# Altium PCB USB_MINER.PcbDoc
Units mm, origin at the board's own origin, x right, y up, seen from the top; angles counter-clockwise.
Board outline 90 x 25 mm, 2 copper layers (Top Layer, Bottom Layer); 92 components, 46 nets, 313 pads, 675 vias.
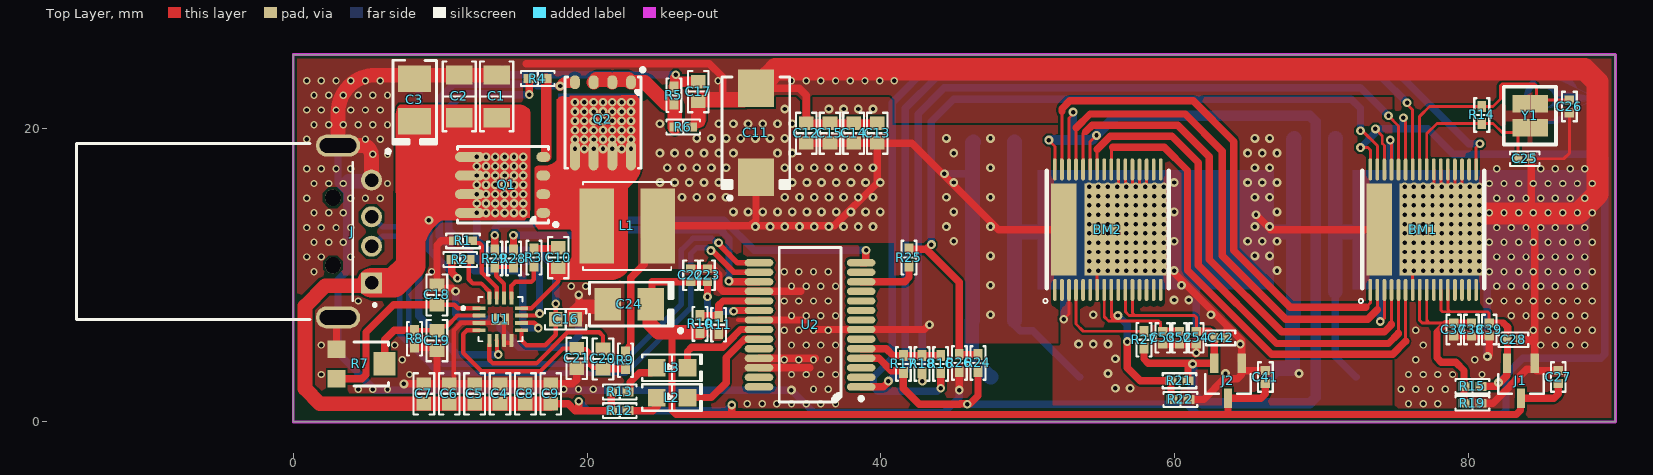
[diagram p0: Top Layer view]
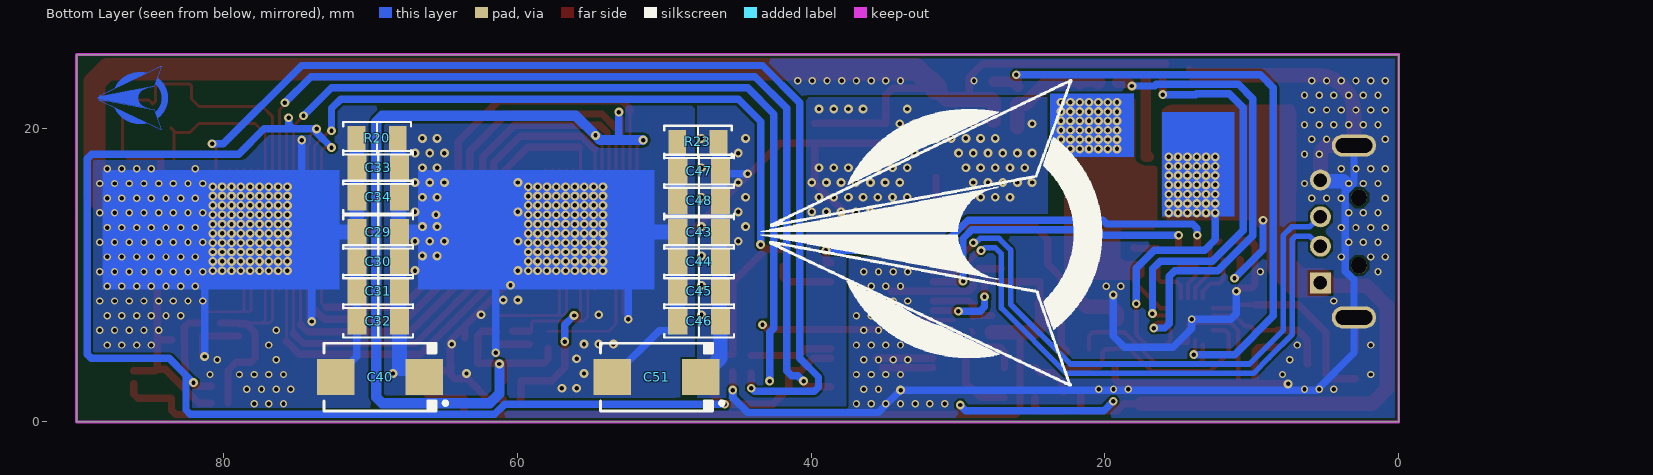
[diagram p1: Bottom Layer view, seen from below]

## Layer stack, top to bottom
Top Solder: solder mask 0.0102, Solder Resist, Dk 3.5
Top Layer: signal copper 0.0356
Dielectric 1: dielectric 0.32, FR-4, Dk 4.8
Bottom Layer: signal copper 0.0356
Bottom Solder: solder mask 0.0102, Solder Resist, Dk 3.5

## Board outline
0,0 0,25 90,25 90,0

## Design rules (kind name [scope] priority, off if disabled: settings)
Clearance [All] p1: gap=0.15 ignorepadtopadclearanceinfootprint=FALSE
DiffPairsRouting [All] p1: maxlimit=0.254 minlimit=0.254 mostfreqgap=0.254 toplayer_minwidth=0.381 toplayer_maxwidth=0.381 toplayer_prefwidth=0.381 bottomlayer_minwidth=0.381 bottomlayer_maxwidth=0.381 bottomlayer_prefwidth=0.381 maxuncoupledlength=12.7
PolygonConnect [All] p1: connectstyle=Direct reliefconductorwidth=0.254 reliefentries=4 polygonreliefangle="90 Angle" airgapwidth=0.254
RoomDefinition USB_TO_TTL [InComponentClass('USB_TO_TTL')] p1: confinementstyle=ConfineOut formatcopy=TRUE lockcomponents=FALSE outline 127.635,108.585 205.486,108.585 205.486,122.555 127.635,122.555
RoomDefinition POWER [InComponentClass('POWER')] p2: confinementstyle=ConfineOut formatcopy=TRUE lockcomponents=FALSE outline 133.858,127.381 361.95,127.381 361.95,149.098 133.858,149.098
RoomDefinition BLOCK2 [InComponentClass('BLOCK2')] p3: confinementstyle=ConfineOut formatcopy=TRUE lockcomponents=FALSE outline 210.439,100.457 338.582,100.457 338.582,120.65 210.439,120.65
RoomDefinition BLOCK1 [InComponentClass('BLOCK1')] p4: confinementstyle=ConfineOut formatcopy=TRUE lockcomponents=FALSE outline 142.367,155.575 304.165,155.575 304.165,175.768 142.367,175.768
RoutingVias [All] p1: holewidth=0.3 width=0.6 viastyle="Through Hole" minholewidth=0.3 minwidth=0.6 maxholewidth=0.3 maxwidth=0.6
SolderMaskExpansion [All] p1: expansion=0.102 istentingtop=FALSE
Width [All] p1: maxlimit=4 minlimit=0.2 preferedwidth=0.5
29 further rules are at their usual default settings.

## Classes and differential pairs
component class USB_TO_TTL: C22 C23 C24 L2 L3 R10 R11 R12 R13 R24 R25 R26 U2
component class POWER: C1 C2 C3 C4 C5 C6 C7 C8 C9 C10 C11 C12 C13 C14 C15 C16 C17 C18 C19 C20 C21 J L1 Q1 Q2 R1 R2 R3 R4 R5 R6 R7 R8 R9 R28 R29 U1
component class BLOCK2: BM2 C41 C42 C43 C44 C45 C46 C47 C48 C51 C52 C53 C54 J2 R21 R22 R23 R27
component class BLOCK1: BM1 C25 C26 C27 C28 C29 C30 C31 C32 C33 C34 C37 C38 C39 C40 J1 R14 R15 R16 R17 R18 R19 R20 Y1
differential pair USB: +USB_P -USB_N

## Components (designator, comment, footprint, x,y, rotation, side; value= is the part's Value field where it differs from the comment)
BM1 "BM1387" BM1387 76.914,13.081 r90 top locked
BM2 "BM1387" BM1387 55.442,13.081 r90 top locked
C1 "1uF" CAP_SMD_1206 13.843,22.151 r90 top
C2 "10uF" CAP_SMD_1206 11.303,22.151 r90 top
C3 "100uF" CAP-TAN-CASE-B 8.255,21.907 r90 top
C4 "100nF" CAP-SMD-0603 14.072,1.905 r90 top
C5 "10uF" CAP-SMD-0603 12.344,1.905 r90 top
C6 "10uF" CAP-SMD-0603 10.617,1.905 r90 top
C7 "10uF" CAP-SMD-0603 8.89,1.905 r90 top
C8 "10uF" CAP-SMD-0603 15.799,1.905 r90 top
C9 "10uF" CAP-SMD-0603 17.526,1.905 r90 top
C10 "100nF" CAP-SMD-0603 18.034,11.176 r270 top
C11 "330uF" CAP-TAN-CASE-E 31.496,19.685 r90 top
C12 "10uF" CAP-SMD-0603 34.925,19.645 r90 top
C13 "10uF" CAP-SMD-0603 39.751,19.645 r90 top
C14 "10uF" CAP-SMD-0603 38.142,19.645 r90 top
C15 "10uF" CAP-SMD-0603 36.534,19.645 r90 top
C16 "100nF" CAP-SMD-0603 18.542,6.985 r0 top
C17 "10nF" CAP-SMD-0603 27.559,22.479 r270 top
C18 "100nF" CAP-SMD-0603 9.779,8.636 r270 top
C19 "10nF" CAP-SMD-0603 9.779,5.528 r90 top
C20 "10nF" CAP-SMD-0603 21.082,4.278 r90 top
C21 "1nF" CAP-SMD-0603 19.304,4.318 r90 top
C22 "100nF" CAP-SMD-0402 27.051,9.974 r270 top
C23 "100nF" CAP-SMD-0402 28.194,9.974 r270 top
C24 "100uF" CAP-TAN-CASE-B 22.86,8.001 r180 top
C25 "100nF" CAP-SMD-0402 83.82,17.907 r180 top
C26 "100nF" CAP-SMD-0402 86.868,21.463 r90 top
C27 "1uF" CAP-SMD-0402 86.106,3.048 r270 top
C28 "1uF" CAP-SMD-0402 83.058,5.588 r180 top
C29 "100nF" CAP_SMD_1206 69.469,12.916 r180 bottom
C30 "1uF" CAP_SMD_1206 69.469,10.896 r180 bottom
C31 "100nF" CAP_SMD_1206 69.469,8.877 r180 bottom
C32 "1uF" CAP_SMD_1206 69.469,6.858 r180 bottom
C33 "100nF" CAP_SMD_1206 69.469,17.31 r180 bottom
C34 "1uF" CAP_SMD_1206 69.469,15.29 r180 bottom
C37 "100nF" CAP-SMD-0402 78.994,6.282 r90 top
C38 "100nF" CAP-SMD-0402 80.2,6.282 r90 top
C39 "100nF" CAP-SMD-0402 81.407,6.282 r90 top
C40 "330uF" CAP-TAN-CASE-E 69.342,3.048 r0 bottom
C41 "1uF" CAP-SMD-0402 66.167,3.048 r270 top
C42 "1uF" CAP-SMD-0402 63.119,5.715 r180 top
C43 "100nF" CAP_SMD_1206 47.625,12.916 r180 bottom
C44 "1uF" CAP_SMD_1206 47.625,10.896 r180 bottom
C45 "100nF" CAP_SMD_1206 47.625,8.877 r180 bottom
C46 "1uF" CAP_SMD_1206 47.625,6.858 r180 bottom
C47 "100nF" CAP_SMD_1206 47.625,17.056 r180 bottom
C48 "1uF" CAP_SMD_1206 47.625,15.036 r180 bottom
C51 "330uF" CAP-TAN-CASE-E 50.523,3.048 r0 bottom
C52 "100nF" CAP-SMD-0402 60.325,5.715 r90 top
C53 "100nF" CAP-SMD-0402 59.182,5.715 r90 top
C54 "100nF" CAP-SMD-0402 61.468,5.715 r90 top
J "USB-AM-S-X-X-TH" SAMTEC_USB-AM-S-X-X-TH 3.048,12.954 r270 top
J1 "MCP1702T-3602E/CB" SOT95P255X145-3N 83.566,2.794 r180 top
J2 "MCP1702T-3602E/CB" SOT95P255X145-3N 63.627,2.794 r180 top
L1 "1.5uH" IND 22.733,13.335 r0 top
L2 "LED" LED-SMD-0805 25.781,1.651 r0 top
L3 "LED" LED-SMD-0805 25.781,3.683 r0 top
Q1 "TPHR9003NL" "ADVANCE SOP" 14.515,16.129 r180 top
Q2 "TPHR9003NL" "ADVANCE SOP" 21.082,20.611 r270 top
R1 "1K" RES-SMD-0402 11.557,12.319 r180 top
R2 "100K" RES-SMD-0402 11.37,11.049 r180 top
R3 "0R" RES-SMD-0402 16.383,11.176 r270 top
R4 "0R" RES-SMD-0402 16.637,23.368 r180 top
R5 "100R" RES-SMD-0402 25.908,22.225 r90 top
R6 "3M" RES-SMD-0402 26.543,20.066 r0 top
R7 "1K" POT 4.572,3.937 r270 top
R8 "1K" RES-SMD-0402 8.255,5.655 r270 top
R9 "100R" RES-SMD-0402 22.606,4.191 r270 top
R10 "4.7K" RES-SMD-0402 27.686,6.664 r270 top
R11 "10K" RES-SMD-0402 28.956,6.604 r90 top
R12 "100R" RES-SMD-0402 22.225,0.762 r180 top
R13 "100R" RES-SMD-0402 22.225,2.032 r180 top
R14 "1M" RES-SMD-0402 80.899,20.888 r270 top
R15 "12.4R" RES-SMD-0402 80.264,2.413 r0 top
R16 "33R" RES-SMD-0402 44.069,3.937 r90 top
R17 "1K" RES-SMD-0402 41.529,3.937 r270 top
R18 "33R" RES-SMD-0402 42.799,3.937 r90 top
R19 "10R" RES-SMD-0402 80.264,1.27 r180 top
R20 "0.5R" RES-SMD-1206 69.544,19.304 r180 bottom
R21 "12.4R" RES-SMD-0402 60.325,2.794 r0 top
R22 "10R" RES-SMD-0402 60.385,1.524 r180 top
R23 "0.5R" RES-SMD-1206 47.7,19.05 r180 bottom
R24 "4.7K" RES-SMD-0402 46.609,4.004 r270 top
R25 "0R" RES-SMD-0402 41.91,11.176 r270 top
R26 "4.7K" RES-SMD-0402 45.339,4.004 r90 top
R27 "4.7K" RES-SMD-0402 57.912,5.588 r270 top
R28 "0R" RES-SMD-0402 14.986,11.116 r90 top
R29 "0R" RES-SMD-0402 13.716,11.116 r90 top
U1 "TPS51219" QFN50P300X300X80-17N 14.097,6.985 r0 top
U2 "FT232RL" SSOP 35.179,6.604 r180 top
Y1 "25MHz" XTALL 84.201,20.828 r90 top

## Footprints (in the part's own frame and the unit in brackets; to place one, negate y for a bottom-side part, rotate by r counter-clockwise, add the part's x,y. Pads: shape width x height; smd on the part's side, far side on the other; paste and mask are expansions set on the pad)
"ADVANCE SOP" [mm]
  oval 2x0.675 smd: D(2.503,1.905) D(2.503,-0.635) D(2.503,0.635) D(2.503,-1.905)
  oval 0.95x0.675 smd: G(-2.503,-1.905) S(-2.503,1.905) S(-2.503,-0.635) S(-2.503,0.635)
  Top Layer region: -1.575,2.25 2.75,2.25 2.75,-2.25 -1.575,-2.25
  silkscreen extent -3.48,-2.6 3.35,2.82, body extent -2.8,-2.55 3.3,2.55, height 1.05
BM1387 [mm]
  oval 1.5x0.25 smd: 1(-4.1,3.6) 2(-4.1,3.12) 3(-4.1,2.64) 4(-4.1,2.16) 5(-4.1,1.68) 6(-4.1,1.2) 7(-4.1,0.72) 8(-4.1,0.24) 9(-4.1,-0.24) 10(-4.1,-0.72) 11(-4.1,-1.2) 12(-4.1,-1.68) 13(-4.1,-2.16) 14(-4.1,-2.64) 15(-4.1,-3.12) 16(-4.1,-3.6) 17(4.1,-3.6) 18(4.1,-3.12) 19(4.1,-2.64) 20(4.1,-2.16) 21(4.1,-1.68) 22(4.1,-1.2) 23(4.1,-0.72) 24(4.1,-0.24) 25(4.1,0.24) 26(4.1,0.72) 27(4.1,1.2) 28(4.1,1.68) 29(4.1,2.16) 30(4.1,2.64) 31(4.1,3.12) 32(4.1,3.6)
  rect 6.25x5.6 smd: 33(0,-1.2)
  rect 6.25x1.75 smd: 34(0,3)
  Top Layer pour cut-out: 4.953,3.683 -4.953,3.683 -4.953,-3.81 4.953,-3.81
  Bottom Layer region: -4.086,-11.303 4.064,-11.303 4.064,4.797 -4.086,4.797
  silkscreen extent -5,-4.15 4,4.39, body extent -8.75,-11.18 8.75,4.72, height 12.65
CAP-SMD-0402 [mm]
  rect 0.6x0.64 smd: 1(-0.44,0) 2(0.44,0)
  silkscreen extent -1,-0.5 1,0.5, body extent -0.5,-0.26 0.5,0.26, height 0.52
CAP-SMD-0603 [mm]
  rect 0.9x1 smd: 1(-0.675,0) 2(0.675,0)
  silkscreen extent -1.4,-0.7 1.4,0.7, body extent -0.8,-0.41 0.8,0.41, height 0.82
CAP-TAN-CASE-B [mm]
  rect 1.8x2.23 smd: 1(-1.46,0) 2(1.46,0)
  silkscreen extent -3.62,-1.5 2.71,1.92, body extent -1.87,-1.45 1.86,1.45, height 2
CAP-TAN-CASE-E [mm]
  rect 2.55x2.45 smd: 1(-3.025,0) 2(3.025,0)
  silkscreen extent -4.57,-2.3 3.8,2.3, body extent -3.81,-2.3 3.79,2.3, height 2
CAP_SMD_1206 [mm]
  rect 1.3x1.8 smd: 1(-1.45,0) 2(1.45,0)
  silkscreen extent -2.37,-1.12 2.37,1.12, body extent -1.6,-0.8 1.6,0.8, height 1.2
IND [mm]
  rect 2.35x5.1 smd: 1(-2.075,0) 2(2.075,0)
  silkscreen extent -3,-3 3,3, body extent -3.15,-3 3.15,3, height 4.5
LED-SMD-0805 [mm]
  rect 1.2x1.2 smd: 1(-1.05,0) 2(1.05,0)
  silkscreen extent -2.03,-0.9 2.03,0.9, body extent -1,-0.62 1,0.63, height 0.9
POT [mm]
  rect 1.2x1.2 smd: 1(-1,-1.625) 3(1,-1.625)
  rect 1.6x1.5 smd: 2(0,1.625)
  silkscreen extent -1.5,-0.42 1.5,1.92, body extent -1.8,-1.74 1.8,2.13, height 1.15
QFN50P300X300X80-17N [mm]
  rrect25% 0.89x0.26 smd: 1(-1.44,0.75) 2(-1.44,0.25) 3(-1.44,-0.25) 4(-1.44,-0.75) 9(1.44,-0.75) 10(1.44,-0.25) 11(1.44,0.25) 12(1.44,0.75)
  rrect25% 0.26x0.89 smd: 5(-0.75,-1.44) 6(-0.25,-1.44) 7(0.25,-1.44) 8(0.75,-1.44) 13(0.75,1.44) 14(0.25,1.44) 15(-0.25,1.44) 16(-0.75,1.44)
  rect 1.2x0.8 smd paste-2: 17(0,0)
  round 0.5 hole 0.3: 17(0,0)
  silkscreen extent -2.63,-1.5 1.5,1.5, body extent -1.5,-1.5 1.5,1.5, height 0.8
RES-SMD-0402 [mm]
  rect 0.75x0.6 smd: 1(-0.575,0) 2(0.575,0)
  silkscreen extent -1.14,-0.51 1.14,0.51, body extent -0.5,-0.25 0.5,0.25, height 0.35
RES-SMD-1206 [mm]
  rect 1.2x1.65 smd: 1(-1.4,0) 2(1.4,0)
  silkscreen extent -2.3,-1.1 2.3,1.1, body extent -1.58,-0.8 1.62,0.8, height 0.6
SAMTEC_USB-AM-S-X-X-TH [mm]
  rect 1.428x1.428 hole 0.92: 01(3.5,2.28)
  round 1.428 hole 0.92: 02(1,2.28) 03(-1,2.28) 04(-3.5,2.28)
  oval 1.508x3.016 hole 1 slot 2.5 at 90 deg: S1(-5.85,0) S2(5.85,0)
  round 1.1 hole 1.1 unplated: ""(-2.3,-0.35) ""(2.3,-0.35)
  silkscreen extent -6,-17.8 6,2.6, body extent -6.35,-17.65 6.35,2.55, height 4.5
SOT95P255X145-3N [mil]
  rect 22x52 smd: 1(-37,-47) 2(37,-47) 3(0,47)
  silkscreen extent -61,-18 61,35, body extent -59,-49 59,49, height 40
SSOP [mm]
  oval 1.95x0.5 smd: 1(-3.475,4.225) 2(-3.475,3.575) 3(-3.475,2.925) 4(-3.475,2.275) 5(-3.475,1.625) 6(-3.475,0.975) 7(-3.475,0.325) 8(-3.475,-0.325) 9(-3.475,-0.975) 10(-3.475,-1.625) 11(-3.475,-2.275) 12(-3.475,-2.925) 13(-3.475,-3.575) 14(-3.475,-4.225) 15(3.475,-4.225) 16(3.475,-3.575) 17(3.475,-2.925) 18(3.475,-2.275) 19(3.475,-1.625) 20(3.475,-0.975) 21(3.475,-0.325) 22(3.475,0.325) 23(3.475,0.975) 24(3.475,1.625) 25(3.475,2.275) 26(3.475,2.925) 27(3.475,3.575) 28(3.475,4.225)
  silkscreen extent -3.6,-5.25 2.1,5.25, body extent -3.91,-5.1 3.91,5.1, height 1.97
XTALL [mm]
  rect 1.2x1.2 smd: 1(0.813,-0.612) 2(-0.813,0.613) 3(-0.813,-0.612) 4(0.813,0.613)
  silkscreen extent -1.96,-1.76 1.98,1.8, body extent -1.6,-1.27 1.6,1.23, height 0.87

## Part data
C1 C2 C4 C5 C6 C7 C8 C9 C10 C12 C13 C14 C15 C16 C17 C18 C19 C20 C21 C22 C23 C25 C26 C27 C28 C29 C30 C31 C32 C33 C34 C37 C38 C39 C41 C42 C43 C44 C45 C46 C47 C48 C52 C53 C54: library part CAP
C3 C11 C24 C40 C51: library part "POLARIZED CAP"
J: "USB-A (USB TYPE-A) USB 2.0 Plug Connector 4 Position Through Hole, Right Angle", Package=None, Availability=Unavailable, MF=Samtec, MP=USB-AM-S-F-B-TH, Price=None, SnapEDA_Link=https://www.snapeda.com/parts/USB-AM-S-F-B-TH/Samtec%20Inc./view-part/474273/?ref=snap, Toby_UK-Purchase-URL=https://snapeda.com/shop?store=Toby+UK&id=474273
J1 J2: "250 mA Low Quiescent Current LDO Regulator", Package=None, Availability=Unavailable, MP=MCP1702T-3602E/CB, Price=None
L1: library part INDUCTOR
Q1 Q2: library part MOSFET-N
R1 R2 R3 R4 R5 R6 R8 R9 R10 R11 R12 R13 R14 R15 R16 R17 R18 R19 R20 R21 R22 R23 R24 R25 R26 R27 R28 R29: library part RES
R7: library part Potentiometer, "Potentiometer"
Y1: library part XTAL, "Crystal Oscillator", LatestRevisionDate=17-Jul-2002, LatestRevisionNote="Re-released for DXP Platform.", PackageDescription="Crystal, Thru-Hole; 2 Leads; Body 3.1 x 8.2 mm (Dia.xH)", PackageReference=R38, Published=8-Jun-2000, Publisher="Altium Limited"

## Via types
v1: diameter 0.6, hole 0.3, Top Layer to Bottom Layer, 451 vias
v2: diameter 0.5, hole 0.3, Top Layer to Bottom Layer, 224 vias

## Nets (pads, with @x,y where several pads share a name; then routed paths per layer and width w, separated by ;. In a path a pad name is that pad's centre, name@x,y a point inside that pad or via, vN(x,y) a via of type N, cw(c..) or ccw(c..) an arc to the next point about the centre after c; other vN are vias at no path point)
0.8V-1: BM1.8 BM1.9 C37.2 C38.2 R15.1 R19.2 | length 15.6
  Top Layer w0.2: BM1.8 76.674,6.892 76.844,6.722 77.343,6.722 ; BM1.9 77.154,6.911 77.343,6.722 ; C37.2 77.343,6.722
  Top Layer w0.5: R19.2 R15.1 79.689,3.496 79.121,4.064 78.144,4.064 77.851,4.357 77.851,6.096 78.427,6.672 78.944,6.672 C37.2 C38.2
0.8V-2: BM2.8 BM2.9 C52.2 C53.2 R21.1 R22.2 | length 18.3
  Top Layer w0.2: BM2.8 55.202,7.155 55.499,6.858 58.928,6.858 59.045,6.741 59.045,6.292 C53.2 ; 55.682,7.112 BM2.9
  Top Layer w0.5: v1@55.88,7.112 55.98,7.112 56.107,7.239 v1(56.134,7.239) ; v1(56.769,5.461) 56.769,3.683 57.658,2.794 R21.1 59.75,1.574 59.8,1.524 R22.2 ; C53.2 C52.2
  Bottom Layer w0.5: v1(56.134,7.239) 56.769,6.604 v1(56.769,5.461)
1.8V-1: BM1.11 BM1.12 BM1.27 BM1.30 BM1.32 C28.2 C39.2 J1.2 R15.2 R17.2 R24.2 U2.4 | length 113.5
  Top Layer w0.2: v1(72.644,18.669) 73.152,18.669 73.314,18.507 BM1.32 ; v1(73.66,19.939) 73.66,19.923 74.126,19.457 74.126,18.949 74.274,18.801 BM1.30 ; v1(75.565,20.701) 75.565,20.593 75.714,20.444 75.714,20.268 BM1.27 ; BM1.11 78.114,7.611 78.232,7.493 78.74,7.493 ; BM1.12 78.594,7.639 78.74,7.493 ; C39.2 81.407,7.366 81.28,7.493 78.74,7.493
  Top Layer w0.5: U2.4 39.867,4.329 40.709,3.487 41.479,3.487 41.529,3.437 41.529,2.286 42.615,1.2 45.37,1.2 ; 45.385,1.219 45.855,1.219 v1(45.874,1.2) ; v1@45.874,1.219 46.06,1.219 46.609,1.768 R24.2 ; R15.2 v1@81.885,2.413 ; C39.2 82.384,6.722 82.677,6.429 82.677,5.424 82.651,5.398 82.651,4.012 J1.2 82.597,3.958 82.597,3.125 v1@82.09,2.619
  Bottom Layer w0.5: v1(45.874,1.2) 60.858,1.2 61.55,0.508 82.257,0.508 82.55,0.801 82.55,3.175 ; v1(72.644,18.669) v1@73.641,19.666 ; v1(73.66,19.939) 75.272,19.939 ; v1(75.565,20.701) 75.546,20.682 75.546,20.213 75.272,19.939 ; v1(82.042,2.667) 82.55,3.175 ; 75.272,19.939 77.236,19.939 78.952,18.223 88.965,18.223 89.281,17.907 89.281,4.611 88.988,4.318 83.693,4.318 82.55,3.175
1.8V-2: BM2.11 BM2.12 BM2.27 BM2.30 BM2.32 C42.2 C54.2 J2.2 R21.2 R27.2 | length 78.5
  Top Layer w0.2: v1(51.435,19.177) 51.435,19.142 51.842,18.735 BM2.32 ; BM2.30 52.802,20.69 53.086,20.974 v1(53.086,21.082) ; BM2.27 54.232,17.191 54.232,18.331 54.222,18.342 54.222,19.039 v1(54.676,19.493) ; BM2.11 56.642,7.493 56.896,7.239 57.277,7.239 ; BM2.12 57.122,7.394 57.277,7.239 ; C54.2 61.468,7.112 61.341,7.239 57.277,7.239
  Top Layer w0.5: R27.2 57.912,4.281 58.205,3.988 J2.2 62.687,5.862 62.394,6.155 C54.2 ; R21.2 60.9,3.921
  Bottom Layer w0.5: 52.898,19.177 53.086,19.365 v1(53.086,21.082)
  Bottom Layer w0.7: v1(51.435,19.177) 52.898,19.177 54.36,19.177 v1(54.676,19.493) 56.011,20.828 69.186,20.828 69.596,20.418 69.596,1.668 69.186,1.258 61.861,1.258 61.214,1.905 v1(61.214,3.937)
3.3V: R28.2 U2.17 | length 21.1
  Top Layer w0.5: R28.2 v1(14.986,12.7) ; v1(29.656,9.579) 29.683,9.579 29.733,9.529 U2.17
  Bottom Layer w0.5: v1(14.986,12.7) 20.193,12.7 20.574,13.081 29.053,13.081 29.656,12.478 v1(29.656,9.579)
5V: C1.1 C2.1 C3.1 C4.1 C5.1 C6.1 C7.1 C8.1 C9.1 C16.1 C22.2 C23.2 C24.1 C27.2 C41.2 J1.3 J2.3 J.01 Q1.D R2.2 R10.2 R12.2 R13.2 U1.9 U2.20 | length 171.1
  Top Layer w0.3: U1.9 15.537,5.545 15.875,5.207 17.144,5.207 17.867,5.93 C16.1 v1(17.867,8.041)
  Top Layer w0.5: R2.2 10.795,10.16 v1(11.176,9.779) ; C9.1 18.709,1.23 19.177,0.762 19.431,0.762 ; v1(19.431,1.397) 19.431,0.762 ; R13.2 R12.2 19.431,0.762 ; C24.1 24.423,8.104 24.423,9.534 C22.2 C23.2 v1(28.194,8.509) ; 25.781,6.096 25.781,0.793 26.074,0.5 29.845,0.5 ; v1(29.845,1.143) 29.845,0.5 ; v1(29.972,7.529) 29.999,7.529 30.049,7.579 U2.20 ; C41.2 66.167,1.893 65.874,1.6 J2.3 63.627,0.5 ; C27.2 86.106,1.893 85.813,1.6 J1.3 83.537,1.571 83.537,0.793 83.244,0.5 63.627,0.5 ; 29.845,0.5 63.627,0.5
  Top Layer w1: J.01 5.145,9.271 2.193,9.271 0.8,7.878 0.8,2.248 1.818,1.23 C7.1 C6.1 C5.1 C4.1 C8.1 C9.1 ; C24.1 24.257,7.938 24.257,6.682 24.843,6.096 25.781,6.096 27.679,6.096 R10.2
  Top Layer w2: J.01 6.829,9.454 8.001,10.626 8.001,15.621 9.779,17.399 v1@14.732,17.399
  Bottom Layer w0.5: v1(9.236,13.716) 9.236,11.719 v1(11.176,9.779) ; v1(12.483,14.224) 12.483,12.409 13.208,11.684 16.637,11.684 17.867,10.454 v1(17.867,8.041) ; v1(19.431,1.397) 20.066,0.762 29.464,0.762 v1(29.845,1.143) ; v1(28.194,8.509) 28.194,7.822 28.487,7.529 v1(29.972,7.529)
  other v1: 13.118,14.224 13.753,14.224 14.388,14.224 15.023,14.224 15.658,14.224 12.483,14.859 13.118,14.859 13.753,14.859 14.388,14.859 15.023,14.859 15.658,14.859 12.483,15.494 13.118,15.494 13.753,15.494 14.388,15.494 15.023,15.494 15.658,15.494 12.483,16.129 13.118,16.129 13.753,16.129 14.388,16.129 15.023,16.129 15.658,16.129 12.483,16.764 13.118,16.764 13.753,16.764 14.388,16.764 15.023,16.764 15.658,16.764 12.483,17.399 13.118,17.399 13.753,17.399 14.388,17.399 15.023,17.399 15.658,17.399 12.483,18.034 13.118,18.034 13.753,18.034 14.388,18.034 15.023,18.034 15.658,18.034
BO1: BM1.2 BM2.29 | length 35.3
  Top Layer w0.2: BM2.29 53.282,19.988 53.302,20.008 ; 73.794,7.627 BM1.2
  Top Layer w0.5: 53.302,20.008 53.302,20.028 54.229,20.955 60.706,20.955 63.246,18.415 63.246,11.303 67.569,6.98 73.147,6.98 73.794,7.627
CLK1: BM1.6 BM2.24 | length 35.2
  Top Layer w0.2: BM2.24 55.682,18.59 55.788,18.696 ; 75.714,5.483 BM1.6
  Top Layer w0.5: 55.788,18.696 59.282,18.696 60.872,17.106 60.872,10.322 66.585,4.609 74.84,4.609 75.714,5.483
CO1: BM1.5 BM2.26 | length 35.4
  Top Layer w0.2: BM2.26 54.722,18.549 ; 75.214,6.019 75.234,6.039 BM1.5
  Top Layer w0.5: 54.722,18.549 55.604,19.431 59.817,19.431 61.595,17.653 61.595,10.668 66.929,5.334 74.549,5.334 75.214,5.999 75.214,6.019
GND: BM1.3 BM1.7 BM1.19 BM1.20 BM1.21 BM1.22 BM1.23 BM1.29 BM1.33 C1.2 C2.2 C3.2 C4.2 C5.2 C6.2 C7.2 C8.2 C9.2 C11.2 C12.2 C13.2 C14.2 C15.2 C16.2 C17.2 C18.1 C19.1 C21.1 C22.1 C23.1 C24.2 C25.1 C26.1 C27.1 C28.1 C29.1 C30.1 C31.1 C32.1 C33.1 C34.1 C37.1 C38.1 C39.1 C40.2 J1.1 J.04 J.S1 J.S2 R1.2 R6.2 R7.1 R8.2 R11.1 R19.1 R20.1 R26.1 U1.3 U1.7 U1.8 U1.17 U2.7 U2.18 U2.21 U2.25 U2.26 | length 352.1
  Top Layer w0.2: v1(73.986,6.829) 74.047,6.829 74.294,7.076 74.294,8.072 74.274,8.092 BM1.3 ; v1(74.676,19.177) 74.744,19.109 74.744,17.191 BM1.29 ; v1(75.644,10.922) 76.194,10.372 BM1.7 ; v1(77.549,16.002) 77.634,16.087 BM1.23 ; BM1.33 78.594,13.561 BM1.21 ; BM1.22 78.114,14.802 v1(78.184,14.732) ; BM1.33@78.657,13.624 BM1.33@78.974,13.942 ; BM1.33@79.074,14.041 BM1.20 ; v1(79.454,15.367) 79.554,15.467 BM1.19 ; C25.1 86.487,17.907 86.868,18.288 C26.1
  Top Layer w0.3: C6.2@10.622,2.58 10.922,2.88 10.922,6.223 11.434,6.735 U1.3 13.793,6.735 14.043,6.985 14.097,6.985 14.097,6.931 14.347,6.681 U1.7 14.347,5.389 14.367,5.369 U1.8@14.827,5.369 ; R11.1 28.956,6.104 R11.1@29.106,6.254 ; 30.287,6.929 U2.21
  Top Layer w0.5: R7.1 2.947,7.003 J.S2 ; v1(7.533,2.58) C7.2 9.754,2.58 ; R8.2 9.236,5.08 9.263,5.053 9.579,5.053 C19.1 9.779,2.605 9.754,2.58 ; R1.2 10.072,12.319 9.779,12.026 C18.1 9.979,9.111 10.801,9.111 11.022,8.89 v1(11.049,8.89) ; C1.2 C1.2@14.243,24.001 ; 15.837,24.384 28.321,24.384 29.231,23.474 29.231,21.935 ; C21.1 19.304,2.873 19.011,2.58 C9.2 C8.2 C4.2 C5.2 10.622,2.58 C6.2 9.754,2.58 ; v1(19.431,8.636) 19.45,8.617 19.45,7.982 19.597,7.835 ; C22.1 C23.1 28.575,10.414 28.956,10.033 28.956,9.172 29.249,8.879 U2.18 34.555,8.879 ; C11.2 34.44,22.71 34.925,22.225 C12.2 C15.2 C14.2 C13.2 ; U2.26 35.175,3.679 ; U2.25 v2@35.549,4.329 ; U2.21 34.854,6.929 ; v2@35.377,6.279 U2.7 42.955,6.279 43.28,6.604 v1(43.307,6.604) ; v1(45.339,2.159) R26.1 ; C37.1 C38.1 C39.1 81.407,4.572 v1(81.28,4.445) ; R19.1 81.661,1.27 83.968,3.577 84.476,3.577 J1.1@84.506,3.607 ; C28.1 84.213,5.588 84.506,5.295 ; C25.1 84.26,14.861 83.566,14.167 84.506,13.227 84.506,5.295 ; C27.1 84.625,3.488 J1.1@84.506,3.607 ; J1.1@84.506,3.607 J1.1 84.506,5.295
  Top Layer w1: J.04 5.328,18.07 ccw(c4.481,18.07) 5.08,18.669 ccw(c4.754,18.343) 4.754,18.804 J.S1 3.048,21.046 cw(c5.588,21.046) 3.792,22.842 3.807,22.857 cw(c5.603,21.061) 5.603,23.601 C2.2 C1.2 ; C16.2 19.217,7.455 19.597,7.835 21.234,7.835 C24.2 ; 27.559,20.507 C17.2 27.69,21.935 29.231,21.935 30.771,21.935 C11.2@31.496,22.66
  Top Layer w1.5: C11.2@31.496,22.66 C11.2 31.496,22.76 31.971,23.235 32.071,23.235 32.836,24 87.894,24 88.773,23.121 88.773,15.494 87.446,14.167 83.566,14.167 80.159,14.167 v1(80.089,14.097)
  Bottom Layer w0.5: J.S1 3.048,16.248 3.648,15.648 3.648,10.26 3.048,9.66 J.S2 3.048,4.699 5.588,2.159 7.366,2.159 7.514,2.307 7.514,2.561 v1(7.533,2.58) ; 7.533,2.159 v1(33.909,2.159) 35.433,0.635 44.323,0.635 45.339,1.651 v1(45.339,2.159) ; v1(11.049,8.89) 11.049,7.366 11.43,6.985 14.097,6.985 14.097,6.35 15.367,5.08 18.669,5.08 19.431,5.842 v1(19.431,8.636) ; C31.1 C32.1 70.919,4.446 72.317,3.048 C40.2 ; v1(73.986,6.829) 73.986,9.343 ; 74.676,16.51 v1(74.676,19.177) ; v1(81.28,4.445) 81.28,9.906
  Bottom Layer w1: v2@3.525,16.124 3.773,16.372 5.246,16.372 J.04 ; C29.1 C29.1@70.931,12.916 ; C31.1@70.931,8.877 C29.1@70.931,12.916 ; R20.1 70.931,19.291 C29.1@70.931,12.916 ; 74.257,12.916 C29.1@70.931,12.916
  other v1: 75.644,10.287 76.279,10.287 76.914,10.287 77.549,10.287 78.184,10.287 78.819,10.287 79.454,10.287 80.089,10.287 80.724,10.287 76.279,10.922 76.914,10.922 77.549,10.922 78.184,10.922 78.819,10.922 79.454,10.922 80.089,10.922 80.724,10.922 75.644,11.557 76.279,11.557 76.914,11.557 77.549,11.557 78.184,11.557 78.819,11.557 79.454,11.557 80.089,11.557 80.724,11.557 75.644,12.192 76.279,12.192 76.914,12.192 77.549,12.192 78.184,12.192 78.819,12.192 79.454,12.192 80.089,12.192 80.724,12.192 75.644,12.827 76.279,12.827 76.914,12.827 77.549,12.827 78.184,12.827 78.819,12.827 79.454,12.827 80.089,12.827 80.724,12.827 75.644,13.462 76.279,13.462 76.914,13.462 77.549,13.462 78.184,13.462 78.819,13.462 79.454,13.462 80.089,13.462 80.724,13.462 75.644,14.097 76.279,14.097 76.914,14.097 77.549,14.097 78.184,14.097 78.819,14.097 79.454,14.097 80.724,14.097 75.644,14.732 76.279,14.732 76.914,14.732 77.549,14.732 78.819,14.732 79.454,14.732 80.089,14.732 80.724,14.732 75.644,15.367 76.279,15.367 76.914,15.367 77.549,15.367 78.184,15.367 78.819,15.367 80.089,15.367 80.724,15.367 75.644,16.002 76.279,16.002 76.914,16.002 78.184,16.002 78.819,16.002 79.454,16.002 80.089,16.002 80.724,16.002
  other v2: 30.913,1.224 31.913,1.224 32.913,1.224 33.913,1.224 34.913,1.224 35.913,1.224 36.913,1.224 75.913,1.224 76.913,1.224 77.913,1.224 4.413,2.224 5.413,2.224 6.413,2.224 18.413,2.224 19.413,2.224 20.413,2.224 35.413,2.224 36.413,2.224 75.413,2.224 76.413,2.224 77.413,2.224 78.413,2.224 1.913,3.224 7.913,3.224 33.913,3.224 34.913,3.224 35.913,3.224 36.913,3.224 75.913,3.224 76.913,3.224 77.913,3.224 78.913,3.224 80.913,3.224 7.413,4.224 33.413,4.224 34.413,4.224 35.413,4.224 36.413,4.224 76.413,4.224 80.413,4.224 1.913,5.224 6.913,5.224 33.913,5.224 34.913,5.224 35.913,5.224 36.913,5.224 76.913,5.224 84.913,5.224 85.913,5.224 86.913,5.224 87.913,5.224 33.413,6.224 34.413,6.224 35.413,6.224 36.413,6.224 76.413,6.224 84.413,6.224 85.413,6.224 86.413,6.224 87.413,6.224 88.413,6.224 33.913,7.224 34.913,7.224 35.913,7.224 36.913,7.224 82.913,7.224 83.913,7.224 84.913,7.224 85.913,7.224 86.913,7.224 87.913,7.224 4.413,8.224 33.413,8.224 34.413,8.224 35.413,8.224 36.413,8.224 81.413,8.224 82.413,8.224 83.413,8.224 84.413,8.224 85.413,8.224 86.413,8.224 87.413,8.224 88.413,8.224 18.913,9.224 19.913,9.224 33.913,9.224 34.913,9.224 35.913,9.224 36.913,9.224 81.913,9.224 82.913,9.224 83.913,9.224 84.913,9.224 85.913,9.224 86.913,9.224 87.913,9.224 1.413,10.224 9.413,10.224 33.413,10.224 34.413,10.224 35.413,10.224 36.413,10.224 81.413,10.224 82.413,10.224 83.413,10.224 84.413,10.224 85.413,10.224 86.413,10.224 87.413,10.224 88.413,10.224 0.913,11.224 1.913,11.224 3.913,11.224 81.913,11.224 82.913,11.224 83.913,11.224 84.913,11.224 85.913,11.224 86.913,11.224 87.913,11.224 1.413,12.224 2.413,12.224 3.413,12.224 81.413,12.224 82.413,12.224 83.413,12.224 84.413,12.224 85.413,12.224 86.413,12.224 87.413,12.224 88.413,12.224 0.913,13.224 1.913,13.224 2.913,13.224 3.913,13.224 81.913,13.224 82.913,13.224 83.913,13.224 84.913,13.224 85.913,13.224 86.913,13.224 87.913,13.224 1.413,14.224 2.413,14.224 3.413,14.224 81.413,14.224 82.413,14.224 83.413,14.224 84.413,14.224 85.413,14.224 86.413,14.224 87.413,14.224 88.413,14.224 0.913,15.224 3.913,15.224 4.913,15.224 5.913,15.224 81.913,15.224 82.913,15.224 83.913,15.224 84.913,15.224 85.913,15.224 86.913,15.224 87.913,15.224 1.413,16.224 2.413,16.224 3.413,16.224 6.413,16.224 81.413,16.224 82.413,16.224 83.413,16.224 84.413,16.224 85.413,16.224 86.413,16.224 87.413,16.224 88.413,16.224 0.913,17.224 1.913,17.224 2.913,17.224 3.913,17.224 81.913,17.224 84.913,17.224 85.913,17.224 86.913,17.224 87.913,17.224 5.413,18.224 6.413,18.224 0.913,19.224 4.913,19.224 5.913,19.224 1.413,20.224 2.413,20.224 3.413,20.224 4.413,20.224 5.413,20.224 6.413,20.224 0.913,21.224 1.913,21.224 2.913,21.224 3.913,21.224 4.913,21.224 5.913,21.224 1.413,22.224 2.413,22.224 3.413,22.224 4.413,22.224 5.413,22.224 6.413,22.224 0.913,23.224 1.913,23.224 2.913,23.224 3.913,23.224 4.913,23.224 5.913,23.224 28.913,23.224 33.913,23.224 34.913,23.224 35.913,23.224 36.913,23.224 37.913,23.224 38.913,23.224 39.913,23.224 40.913,23.224
GND2: BM1.34 BM2.3 BM2.7 BM2.19 BM2.20 BM2.21 BM2.22 BM2.23 BM2.33 C29.2 C30.2 C31.2 C32.2 C33.2 C34.2 C40.1 C41.1 C42.1 C43.1 C44.1 C45.1 C46.1 C47.1 C48.1 C51.2 C52.1 C53.1 C54.1 J2.1 R20.2 R22.1 R23.1 | length 101
  Top Layer w0.2: v1(52.451,6.985) 52.802,7.336 BM2.3 ; BM2.7 54.722,10.837 v1(54.807,10.922) ; BM2.23 56.162,13.561 BM2.33 57.122,13.561 BM2.21 ; BM2.22 56.642,14.802 v1(56.712,14.732) ; BM2.20 57.602,14.041 58.082,14.521 BM2.19
  Top Layer w0.5: C53.1 C52.1 C54.1 v1(61.468,4.699) v1@61.407,4.638 ; v1(59.252,10.287) 59.271,10.268 59.836,10.268 63.559,6.545 ; R22.1 61.976,1.524 63.373,2.921 64.274,2.921 64.537,3.184 64.537,3.958 J2.1 ; C42.1 63.559,6.545 ; v1(65.532,14.097) 66.548,13.081 BM1.34 ; C41.1 64.686,3.488 64.567,3.607 J2.1 ; 63.559,6.545 64.567,5.537 J2.1
  Bottom Layer w0.5: C46.1@49.087,6.87 49.087,6.596 49.475,6.208 50.338,6.208 53.498,3.048 C51.2 ; v1(52.451,6.985) 52.451,9.245 52.477,9.271 ; 61.188,9.525 61.468,9.245 v1(61.468,4.699)
  Bottom Layer w1: C43.1 C43.1@49.087,12.916 ; C46.1@49.087,6.87 C43.1@49.087,12.916 ; R23.1 49.087,19.037 C43.1@49.087,12.916 ; 53.556,12.916 C43.1@49.087,12.916 ; 65.151,13.208 65.443,12.916 C29.2 ; C40.1 66.903,3.634 68.019,3.634 C32.2 68.081,6.92 68.081,19.241 R20.2
  other v1: 55.959,2.291 56.959,2.291 55.459,3.291 63.459,3.291 68.459,3.291 55.959,4.291 53.459,5.291 54.459,5.291 55.459,5.291 64.459,5.291 54.459,7.291 62.459,7.291 59.959,8.291 60.959,8.291 60.459,9.291 54.172,10.287 54.807,10.287 55.442,10.287 56.077,10.287 56.712,10.287 57.347,10.287 57.982,10.287 58.617,10.287 59.959,10.291 66.959,10.291 54.172,10.922 55.442,10.922 56.077,10.922 56.712,10.922 57.347,10.922 57.982,10.922 58.617,10.922 59.252,10.922 65.459,11.291 66.459,11.291 54.172,11.557 54.807,11.557 55.442,11.557 56.077,11.557 56.712,11.557 57.347,11.557 57.982,11.557 58.617,11.557 59.252,11.557 54.172,12.192 54.807,12.192 55.442,12.192 56.077,12.192 56.712,12.192 57.347,12.192 57.982,12.192 58.617,12.192 59.252,12.192 59.959,12.291 64.959,12.291 65.959,12.291 66.959,12.291 54.172,12.827 54.807,12.827 55.442,12.827 56.077,12.827 56.712,12.827 57.347,12.827 57.982,12.827 58.617,12.827 59.252,12.827 65.459,13.291 66.459,13.291 54.172,13.462 54.807,13.462 55.442,13.462 56.077,13.462 56.712,13.462 57.347,13.462 57.982,13.462 58.617,13.462 59.252,13.462 54.172,14.097 54.807,14.097 55.442,14.097 56.077,14.097 56.712,14.097 57.347,14.097 57.982,14.097 58.617,14.097 59.252,14.097 59.959,14.291 66.959,14.291 54.172,14.732 54.807,14.732 55.442,14.732 56.077,14.732 57.347,14.732 57.982,14.732 58.617,14.732 59.252,14.732 65.459,15.291 66.459,15.291 54.172,15.367 54.807,15.367 55.442,15.367 56.077,15.367 56.712,15.367 57.347,15.367 57.982,15.367 58.617,15.367 59.252,15.367 54.172,16.002 54.807,16.002 55.442,16.002 56.077,16.002 56.712,16.002 57.347,16.002 57.982,16.002 58.617,16.002 59.252,16.002 59.959,16.291 64.959,16.291 65.959,16.291 66.959,16.291 65.459,17.291 66.459,17.291 64.959,18.291 65.959,18.291 66.959,18.291 65.459,19.291 66.459,19.291
NetBM2_4: BM2.4 R27.1 | length 7.2
  Top Layer w0.2: BM2.4 53.282,6.662 53.781,6.163 R27.1
NetC10_1: C10.1 R3.1 | length 1.7
  Top Layer w0.5: R3.1 16.433,11.801 17.984,11.801 C10.1
NetC10_2: C10.2 L1.1 Q1.S Q2.D U1.12 | length 4.2
  Top Layer w0.3: U1.12 16.214,7.735 18.034,9.555 C10.2
  other v1: 19.177,18.579 19.812,18.579 20.447,18.579 21.082,18.579 21.717,18.579 22.352,18.579 22.987,18.579 19.177,19.214 19.812,19.214 20.447,19.214 21.082,19.214 21.717,19.214 22.352,19.214 22.987,19.214 19.177,19.849 19.812,19.849 20.447,19.849 21.082,19.849 21.717,19.849 22.352,19.849 22.987,19.849 19.177,20.484 19.812,20.484 20.447,20.484 21.082,20.484 21.717,20.484 22.352,20.484 22.987,20.484 19.177,21.119 19.812,21.119 20.447,21.119 21.082,21.119 21.717,21.119 22.352,21.119 22.987,21.119 19.177,21.754 19.812,21.754 20.447,21.754 21.082,21.754 21.717,21.754 22.352,21.754 22.987,21.754
NetC17_1: C17.1 R5.2 U1.6 | length 43.6
  Top Layer w0.3: U1.6 13.867,5.525 13.867,4.737 13.947,4.657 v1(13.947,4.576)
  Top Layer w0.5: R5.2 25.908,23.468 26.035,23.595 v1(26.035,23.622)
  Top Layer w0.7: R5.2 25.933,22.8 26.287,23.154 C17.1
  Bottom Layer w0.5: v1(13.947,4.576) 11.172,4.576 8.536,7.212 8.536,22.749 9.409,23.622 v1(26.035,23.622)
NetC18_2: C18.2 R7.3 U1.1 | length 13.6
  Top Layer w0.3: C18.2 10.962,7.961 11.188,7.735 U1.1
  Top Layer w0.5: R7.3 2.963,2.921 4.66,2.921 4.953,3.214 4.953,6.096 6.818,7.961 C18.2
NetC19_2: C19.2 R7.2 R8.1 U1.2 | length 8.8
  Top Layer w0.3: R8.1 9.752,6.23 C19.2 10.079,6.503 10.44,6.503 11.172,7.235 U1.2
  Top Layer w0.5: R7.2 6.223,3.963 6.223,5.588 6.865,6.23 R8.1
NetC20_1: C20.1 C21.2 R9.2 U1.4 | length 15.8
  Top Layer w0.3: U1.4 11.824,6.235 11.557,5.968 11.557,4.699 12.827,3.429 16.79,3.429 18.354,4.993 C21.2 19.344,4.953 19.939,4.953 20.193,4.699 20.193,3.859 20.369,3.683 21.002,3.683 C20.1
  Top Layer w0.5: C20.1 21.088,3.61 22.6,3.61 R9.2
NetC20_2: C20.2 U1.5 | length 10.7
  Top Layer w0.3: U1.5@13.347,5.25 13.347,4.227 13.598,3.976 16.549,3.976 18.669,6.096 20.828,6.096 21.082,5.842 C20.2
NetL2_1: L2.1 R12.1 | length 2.7
  Top Layer w0.5: R12.1 24.472,0.762 24.765,1.055 24.765,1.617 L2.1
NetL2_2: L2.2 U2.23 | length 7.5
  Top Layer w0.5: L2.2 28.448,1.651 29.464,2.667 29.464,4.377 30.306,5.219 30.306,5.225 30.71,5.629 U2.23
NetL3_1: L3.1 R13.1 | length 3
  Top Layer w0.5: R13.1 22.875,2.032 22.925,2.082 22.925,2.694 23.564,3.333 24.381,3.333 L3.1
NetL3_2: L3.2 U2.22 | length 6.6
  Top Layer w0.5: L3.2 26.831,4.787 27.124,5.08 29.242,5.08 29.416,5.254 29.422,5.254 29.656,5.488 29.656,5.494 30.441,6.279 U2.22
NetQ1_G: Q1.G R4.1 | length 5.5
  Top Layer w0.7: Q1.G 17.199,18.034 17.212,18.047 R4.1
NetQ2_G: Q2.G U1.10 | length 31.7
  Top Layer w0.3: U1.10 16.411,6.735 16.669,6.477 v1(16.669,6.382)
  Top Layer w0.7: v1(18.161,22.86) 18.39,23.089 19.164,23.089 19.177,23.102 Q2.G
  Bottom Layer w0.5: v1(16.669,6.382) 15.914,6.382 15.621,6.675 15.621,9.906 15.24,10.287 12.319,10.287 9.936,12.67 9.936,22.001 10.907,22.972 16.506,22.972 16.618,22.86 v1(18.161,22.86)
NetQ2_S: Q2.S R5.1 R6.1 | length 8
  Top Layer w1: Q2.S@20.447,23.114 20.63,23.297 21.534,23.297 21.717,23.114 21.9,23.297 22.804,23.297 22.987,23.114 23.929,23.114 25.393,21.65 R5.1 25.968,21.59 R6.1
NetR1_1: R1.1 U1.15 | length 4.8
  Top Layer w0.3: R1.1 12.282,12.169 12.651,12.169 12.827,11.993 12.827,10.16 13.847,9.14 U1.15
NetR2_1: R2.1 U1.16 | length 3.6
  Top Layer w0.3: R2.1 11.938,11.042 11.938,9.701 12.223,9.416 12.809,9.416 13.347,8.878 U1.16
NetR3_2: R3.2 U1.13 | length 3.5
  Top Layer w0.3: U1.13 14.847,9.259 15.113,9.525 16.207,9.525 16.383,9.701 R3.2
NetR4_2: R4.2 U1.11 | length 26.9
  Top Layer w0.3: U1.11 16.552,7.235 16.683,7.366 v1(16.764,7.366)
  Top Layer w0.5: R4.2 16.062,22.279 v1(16.069,22.272)
  Bottom Layer w0.5: v1(16.069,22.272) 13.809,22.272 13.759,22.322 11.527,22.322 10.586,21.381 10.586,13.036 12.685,10.937 16.241,10.937 16.764,10.414 v1(16.764,7.366)
NetR10_1: R10.1 R11.2 U2.19 | length 4.9
  Top Layer w0.5: R10.1 28.906,7.239 R11.2@28.956,7.189 ; R11.2 R11.2@28.956,7.189 ; U2.19 29.249,8.229 28.956,7.936 R11.2@28.956,7.189
NetR25_2: R25.2 U2.12 | length 4.2
  Top Layer w0.5: U2.12 41.617,9.529 41.91,9.822 R25.2
NetR28_1: R28.1 R29.1 U1.14 | length 3.6
  Top Layer w0.3: U1.14 14.347,9.402 13.818,9.931 13.818,10.439 R29.1 R28.1
POWER_EN: R29.2 U2.14 | length 29
  Top Layer w0.5: R29.2 v1(13.716,12.7) ; U2.14 38.97,10.829 38.97,11.665 v1(38.989,11.684)
  Bottom Layer w0.5: v1(13.716,12.7) 13.732,12.716 13.732,13.169 14.025,13.462 19.878,13.462 20.147,13.731 29.322,13.731 31.369,11.684 v1(38.989,11.684)
RESET: BM1.31 R24.1 R25.1 R26.2 | length 54.3
  Top Layer w0.2: v1(72.644,19.812) 72.771,19.812 73.794,18.789 BM1.31
  Top Layer w0.5: R25.1@41.96,11.801 R25.1 43.093,11.751 ; v1(43.434,12.065) 43.407,12.065 43.093,11.751 ; R24.1 R26.2 45.339,9.505 43.093,11.751
  Bottom Layer w0.5: v1(43.434,12.065) 43.434,20.447 44.943,21.956 72.024,21.956 72.644,21.336 v1(72.644,19.812)
RF: BM1.17 R16.1 | length 70.9
  Top Layer w0.2: BM1.17 80.514,18.665 v1(80.772,18.923)
  Top Layer w0.5: v1(44.069,2.286) 44.069,3.237 R16.1
  Bottom Layer w0.5: v1(44.069,2.286) 44.042,2.286 43.827,2.071 39.79,2.071 39.497,2.364 39.497,3.048 40.767,4.318 40.767,21.717 43.307,24.257 74.676,24.257 80.01,18.923 v1(80.772,18.923)
RI1: BM1.4 BM2.28 | length 36.2
  Top Layer w0.2: BM2.28 53.762,19.642 53.879,19.759 53.952,19.759 ; 74.734,6.65 74.754,6.67 BM1.4
  Top Layer w0.5: 53.952,19.759 54.386,20.193 60.198,20.193 62.357,18.034 62.357,11.049 67.277,6.129 74.276,6.129 74.734,6.587 74.734,6.65
RO: BM1.28 R18.1 | length 56.4
  Top Layer w0.2: v1(74.549,20.828) 75.234,20.143 BM1.28
  Top Layer w0.5: R18.1 42.799,3.249 42.811,3.237 42.811,2.782 v1(42.822,2.771)
  Bottom Layer w0.5: v1(42.822,2.771) 42.822,6.099 42.545,6.376 42.545,20.955 44.323,22.733 72.644,22.733 v1(74.549,20.828)
RST1: BM1.1 BM2.31 | length 36.5
  Top Layer w0.2: BM2.31 52.322,21.133 ; 73.022,7.801 73.314,8.092 BM1.1
  Top Layer w0.5: 52.322,21.133 52.322,21.308 52.858,21.844 61.25,21.844 64.008,19.086 64.008,11.665 67.872,7.801 73.022,7.801
RX: R16.2 R17.1 R18.2 U2.5 | length 5.6
  Top Layer w0.5: U2.5 40.36,4.979 40.827,4.512 R18.2 R16.2
TX: BM1.26 U2.1 | length 61.8
  Top Layer w0.2: v1(75.819,21.717) 75.819,21.618 76.194,21.243 BM1.26
  Top Layer w0.5: U2.1 40.174,2.379 40.494,2.699 40.494,2.752 v1(40.513,2.771)
  Bottom Layer w0.5: v1(40.513,2.771) 40.54,2.771 40.913,3.144 41.333,3.144 41.656,3.466 41.656,21.336 43.815,23.495 74.041,23.495 v1(75.819,21.717)
USB_N: J.02 U2.16 | length 40.7
  Top Layer w0.381: v1(28.426,11.656) 28.485,11.656 28.594,11.547 28.622,11.547 29.982,10.186 31.696,10.186 U2.16
  Bottom Layer w0.381: J.02 5.392,11.954 6.075,12.636 7.016,12.636 7.239,12.413 7.239,5.96 8.822,4.377 9.898,3.301 22.614,3.301 27.051,7.738 27.051,11.433 27.474,11.856 28.167,11.856 28.366,11.656 v1(28.426,11.656)
USB_P: J.03 U2.15 | length 40.8
  Top Layer w0.381: v1(28.954,12.19) 28.954,12.131 29.063,12.021 29.063,12.003 29.669,11.398 30.245,10.821 31.696,10.821 U2.15
  Bottom Layer w0.381: J.03 5.392,13.954 6.075,13.271 7.279,13.271 7.874,12.676 7.874,6.223 10.161,3.936 22.351,3.936 26.416,8.001 26.416,11.696 27.21,12.491 28.497,12.491 28.756,12.232 28.912,12.232 v1(28.954,12.19)
VDD2: BM2.34 C11.1 C12.1 C13.1 C14.1 C15.1 C43.2 C44.2 C45.2 C46.2 C47.2 C48.2 C51.1 L1.2 R9.1 R23.2 | length 70.6
  Top Layer w0.5: R9.1 22.656,4.816 22.656,4.891 22.97,5.205 22.97,9.818 23.883,10.731 23.883,12.41 L1.2 31.115,13.335 ; C11.1 31.496,13.716 31.115,13.335 ; C12.1 C15.1 C14.1 C13.1 ; BM2.34 48.006,13.081 42.117,18.97 C13.1 ; 31.115,13.335 36.83,13.335 39.751,16.256 C13.1
  Bottom Layer w0.5: v1(44.323,16.891) 45.775,16.891 45.959,17.075 45.959,17.272 C47.2
  Bottom Layer w1: R23.2 46.237,18.987 46.237,6.92 C46.2 46.175,4.321 47.448,3.048 C51.1
  other v1: 47.459,7.291 47.459,9.291 47.459,11.291 44.959,12.291 31.459,13.291 32.459,13.291 33.459,13.291 34.459,13.291 35.459,13.291 36.459,13.291 37.459,13.291 38.459,13.291 39.459,13.291 44.459,13.291 47.459,13.291 29.959,14.291 30.959,14.291 31.959,14.291 32.959,14.291 33.959,14.291 34.959,14.291 35.959,14.291 36.959,14.291 37.959,14.291 38.959,14.291 39.959,14.291 44.959,14.291 26.459,15.291 27.459,15.291 28.459,15.291 29.459,15.291 33.459,15.291 34.459,15.291 35.459,15.291 36.459,15.291 37.459,15.291 38.459,15.291 39.459,15.291 44.459,15.291 47.459,15.291 24.959,16.291 25.959,16.291 26.959,16.291 27.959,16.291 28.959,16.291 33.959,16.291 34.959,16.291 35.959,16.291 36.959,16.291 37.959,16.291 38.959,16.291 39.959,16.291 44.959,16.291 25.459,17.291 26.459,17.291 27.459,17.291 28.459,17.291 29.459,17.291 33.459,17.291 34.459,17.291 35.459,17.291 36.459,17.291 37.459,17.291 38.459,17.291 39.459,17.291 47.459,17.291 24.959,18.291 25.959,18.291 26.959,18.291 27.959,18.291 28.959,18.291 29.959,18.291 32.959,18.291 33.959,18.291 44.959,18.291 27.459,19.291 28.459,19.291 29.459,19.291 30.459,19.291 31.459,19.291 32.459,19.291 33.459,19.291 44.459,19.291 47.459,19.291 24.959,20.291 28.959,20.291 29.959,20.291 30.959,20.291 31.959,20.291 32.959,20.291 33.959,20.291 33.459,21.291 36.459,21.291 37.459,21.291 38.459,21.291 39.459,21.291
XIN: BM1.24 C25.2 R14.2 Y1.2 | length 11.5
  Top Layer w0.2: BM1.24 77.154,19.623 77.844,20.313 R14.2 81.668,20.313 82.296,19.685 83.258,19.685 Y1.2@83.38,19.807 ; C25.2 Y1.2@83.38,19.807 ; Y1.2 Y1.2@83.38,19.807
XOUT: BM1.25 C26.2 R14.1 Y1.1 | length 16.5
  Top Layer w0.2: BM1.25 76.674,20.794 77.343,21.463 R14.1 81.661,21.463 82.169,21.971 82.169,22.883 82.286,23 84.496,23 84.613,22.883 84.613,21.841 Y1.1 85.076,21.903 C26.2
pads on no net: BM1.10 BM1.13 BM1.14 BM1.15 BM1.16 BM1.18 BM2.1 BM2.2 BM2.5 BM2.6 BM2.10 BM2.13 BM2.14 BM2.15 BM2.16 BM2.17 BM2.18 BM2.25 J. U2.2 U2.3 U2.6 U2.8 U2.9 U2.10 U2.11 U2.13 U2.24 U2.27 U2.28 Y1.3 Y1.4

## Polygon pours and split planes (outlines as drawn)
GND on Top Layer "NONET_L-01_P-001" (solid, remove dead copper, pour order 5): 0,25.019 0,0 90.043,0 90.043,25.019
VDD2 on Top Layer "NONET_L-01_P-001" (solid, remove dead copper, pour order 0): 23.482,22.09 23.482,10.414 30.48,10.414 30.48,12.192 40.894,12.192 40.894,5.334 52.07,5.334 52.07,20.193 40.767,20.193 40.767,22.098
GND2 on Top Layer "NONET_L-01_P-001" (solid, remove dead copper, pour order 1): 51.689,22.098 51.689,1.143 74.803,1.143 74.803,22.098
GND on Bottom Layer "NONET_L-01_P-001" (solid, remove dead copper, pour order 6): 0,25.019 0,0 90.043,0 90.043,25.019
GND2 on Bottom Layer "NONET_L-01_P-001" (solid, remove dead copper, pour order 4): 47.752,21.523 47.752,1.524 69.85,1.524 69.85,21.463
VDD2 on Bottom Layer "NONET_L-01_P-001" (solid, remove dead copper, pour order 3): 23.876,22.098 23.876,12.192 37.592,12.192 37.592,0.635 47.752,0.635 47.752,22.098 45.72,22.098

## Keep-outs
Keep-Out Layer:
  the board outline again, w0.2

## Other copper
Top Layer:
  region net NetC10_2: 16.426,13.716 ccw(c17.294,13.716) 16.68,13.103 18.839,13.103 cw(c18.533,12.797) 18.966,12.797 18.966,11.378 cw(c18.533,11.378) 18.839,11.071 cw(c18.533,11.378) 18.533,10.944 17.569,10.944 ccw(c17.569,10.638) 17.353,10.854 17.315,10.817 17.315,9.928 ccw(c17.929,10.541) 17.929,9.674 21.857,9.674 ccw(c21.55,11.102) 22.776,10.309 22.776,15.897 23.216,16.337 ccw(c22.133,17.421) 23.665,17.421 23.665,21.761 ccw(c22.615,21.384) 23.32,22.249 18.453,22.103 ccw(c18.471,22.098) 18.487,22.107 ccw(c18.305,21.745) 17.95,21.941 17.95,17.802 cw(c17.031,18.722) 17.031,17.421 16.68,17.421 ccw(c16.68,17.115) 16.464,17.331 16.426,17.294
  region net 5V: 6.985,15.621 6.985,20.977 cw(c7.852,20.977) 7.239,21.59 15.389,21.59 cw(c15.389,20.723) 16.002,21.336 cw(c15.695,21.029) 16.129,21.029 16.129,14.636 cw(c14.828,14.636) 15.748,13.716 10.213,13.716 ccw(c10.213,13.282) 9.906,13.589 9.634,13.317 ccw(c11.43,11.521) 8.89,11.521 8.89,11.43
Bottom Layer:
  rectangle net NetC10_2: 18.034,18.034 23.749,22.352
  rectangle net 5V: 11.176,13.97 16.129,21.082
  region: 504 vertices and 0 holes, not listed, extent 85.244,22.727 87.376,23.793
  region: 259 vertices and 0 holes, not listed, extent 85.244,22.064 88.6,22.695
  region: 505 vertices and 0 holes, not listed, extent 85.236,20.287 87.384,21.369
  region: 260 vertices and 0 holes, not listed, extent 85.244,21.393 88.6,22.024
  region: 829 vertices and 1 holes, not listed, extent 84.21,22.135 88.465,24.211
  region: 816 vertices and 1 holes, not listed, extent 84.218,19.885 88.481,21.929
  region: 630 vertices and 0 holes, not listed, extent 83.784,20.682 84.62,23.398

## Silkscreen, mask and mechanical layers (free items; w line width, h text height)
Bottom Overlay:
  drawing of 7 lines, arcs and shapes, not listed